# Altium PCB PCB3.PcbDoc
Units mm, origin at the board's own origin, x right, y up, seen from the top; angles counter-clockwise.
Board outline 136.14 x 105.28 mm, 2 copper layers (Top Layer, Bottom Layer), stack 1.571 mm thick; 97 components, 71 nets, 383 pads, 93 vias.
Unrouted connection lines stored in the file: 2.
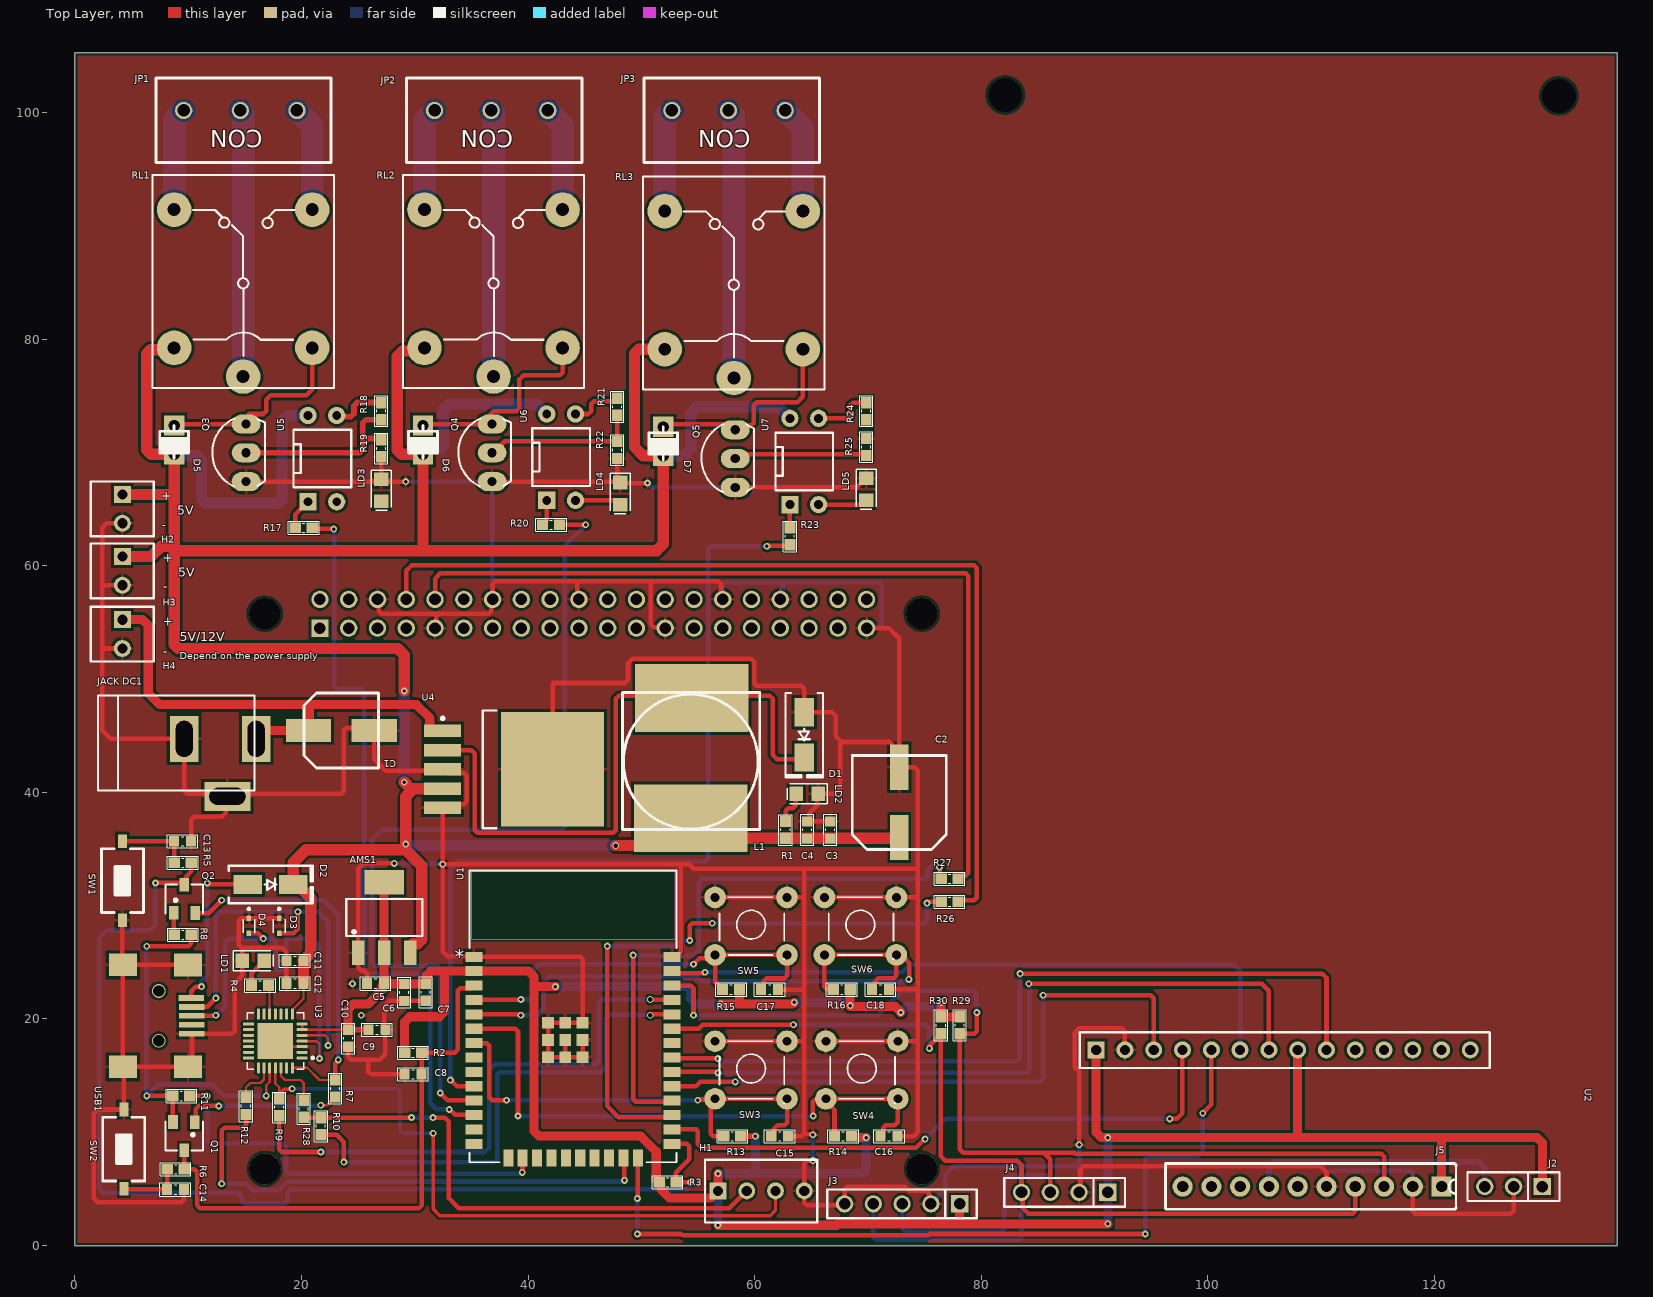
[diagram p0: Top Layer view]
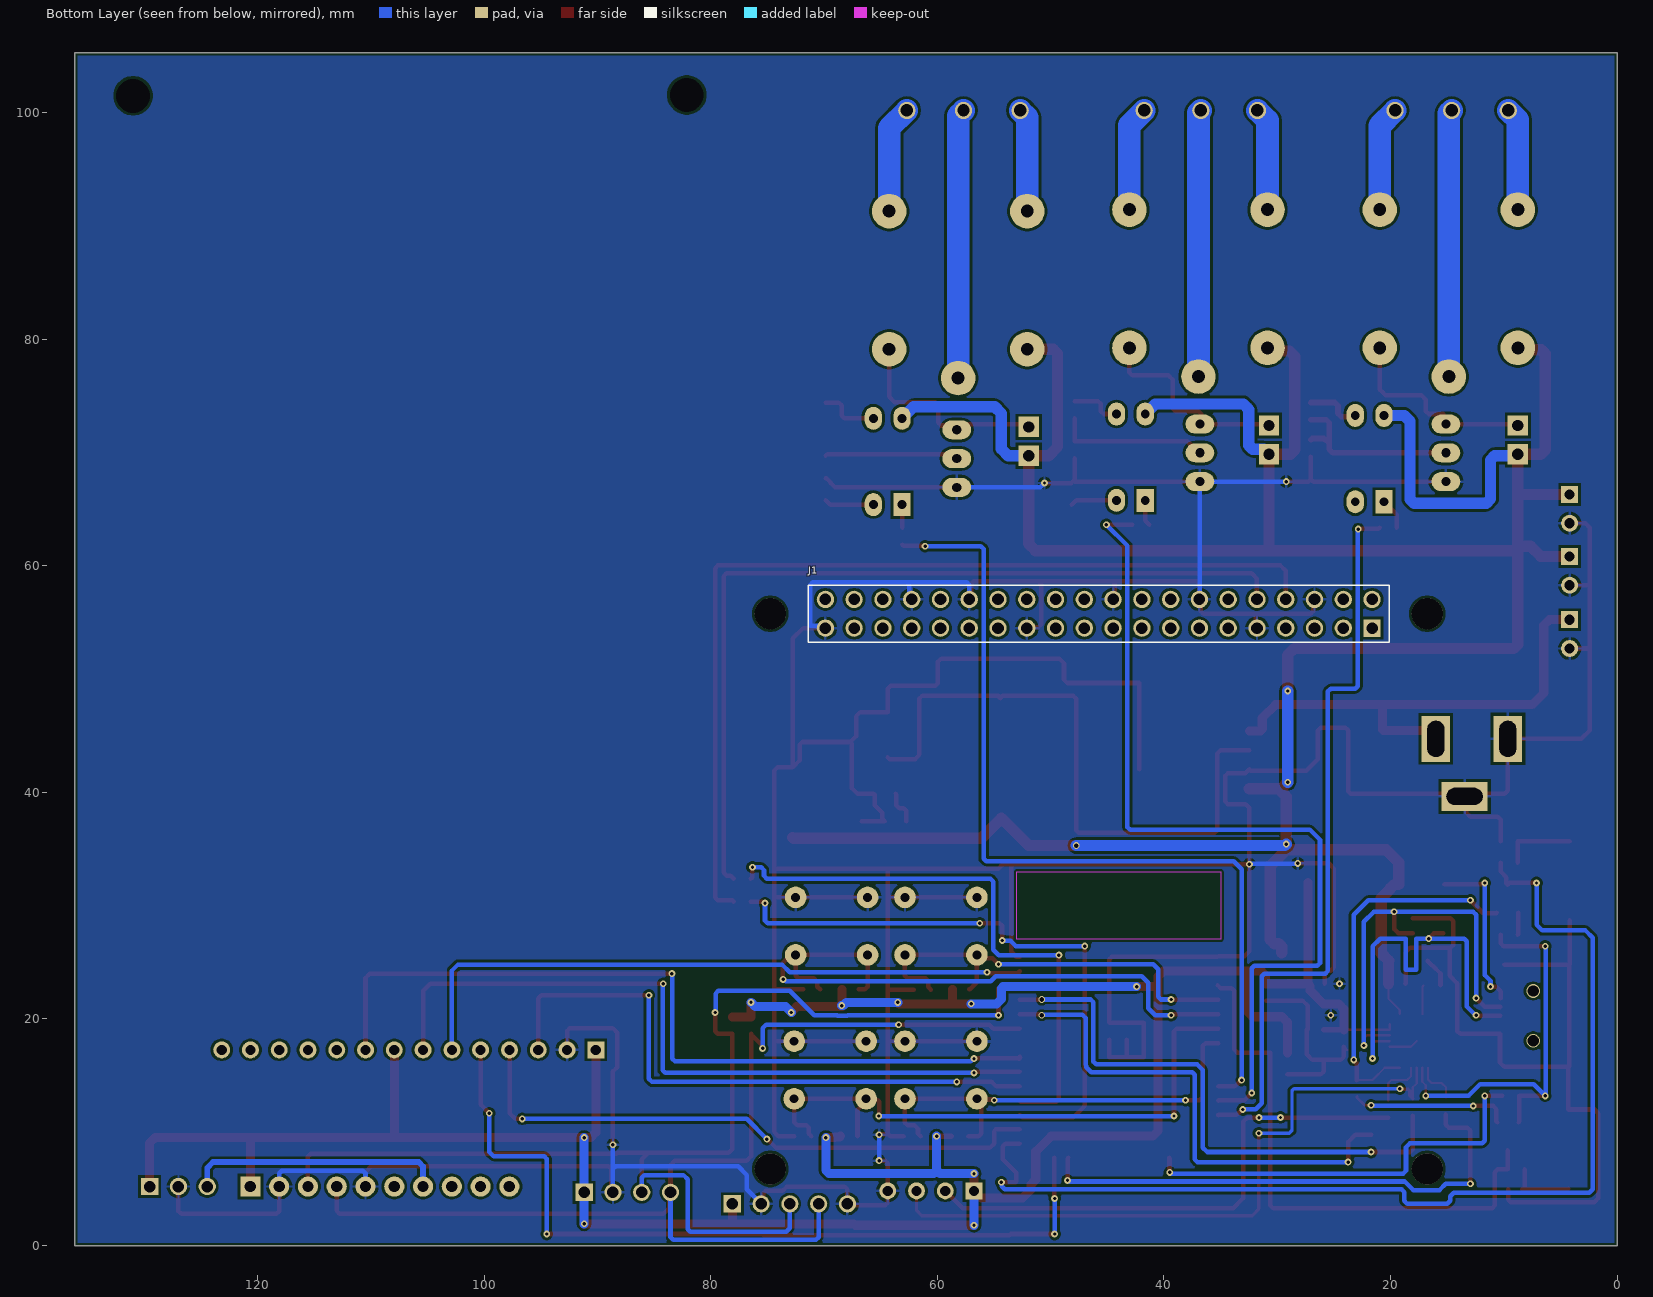
[diagram p1: Bottom Layer view, seen from below]
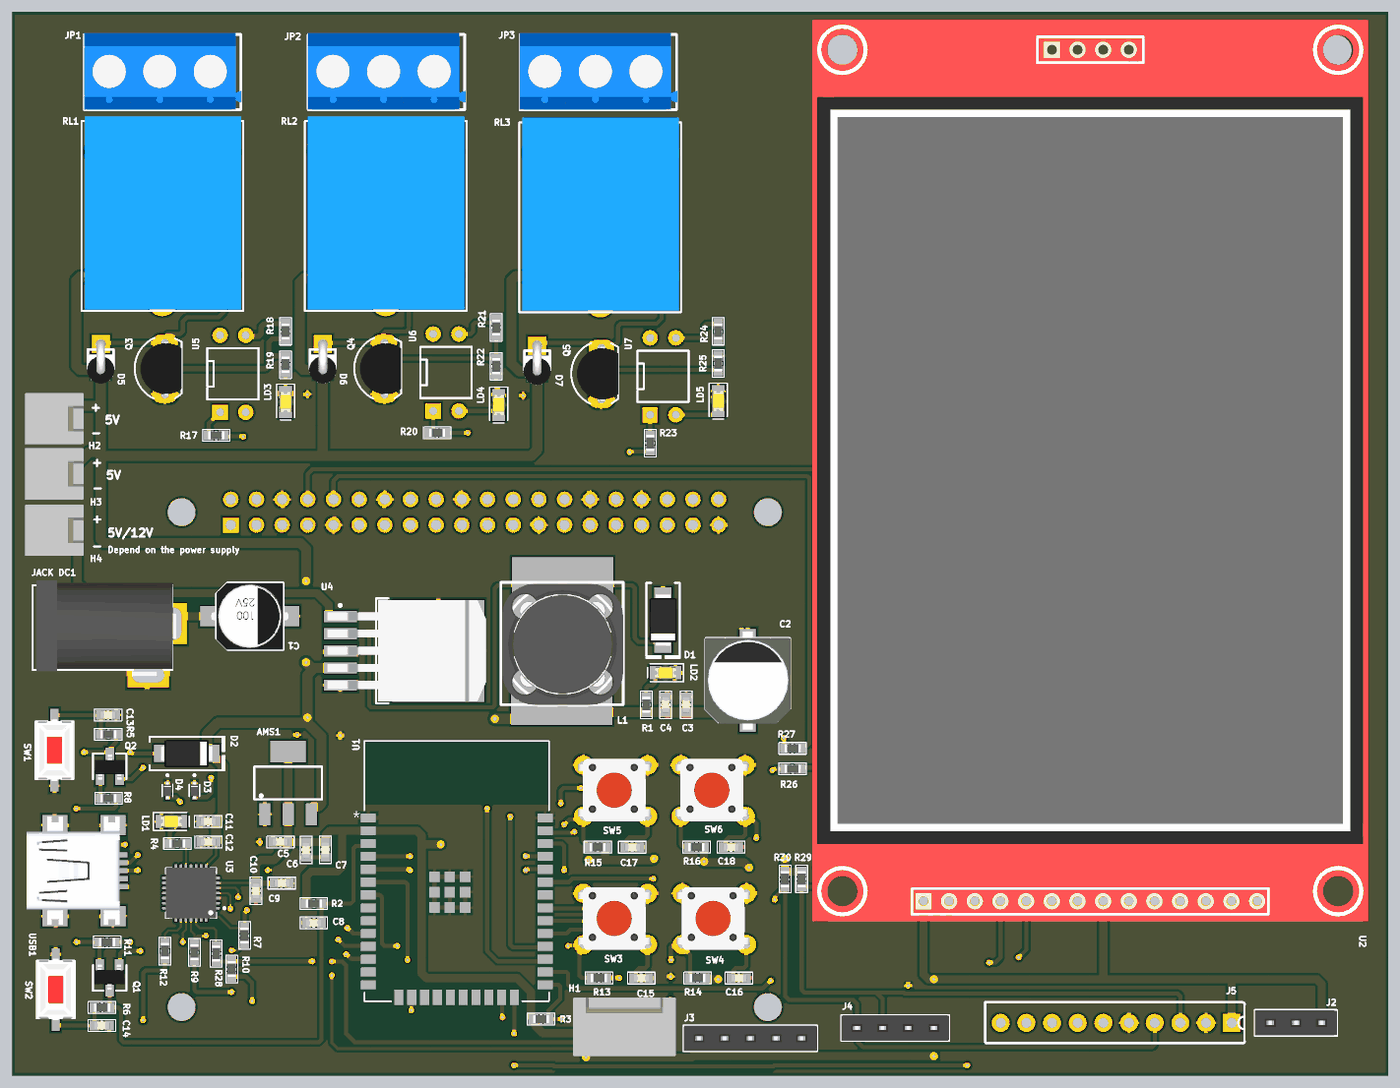
[diagram p2: 3D render of the assembled board from above, using the file's embedded part models]

## Layer stack, top to bottom
Top Solder: solder mask 0.0102, Solder Resist, Dk 3.5
Top Layer: signal copper 0.0356
Dielectric 1: dielectric 1.5, FR-4, Dk 4.8
Bottom Layer: signal copper 0.0356
Bottom Solder: solder mask 0.0102, Solder Resist, Dk 3.5

## Board outline
0,0 0,105.283 136.144,105.283 136.144,0

## Design rules (kind name [scope] priority, off if disabled: settings)
BoardOutlineClearance [All] p1: gap=0.25 ignorepadtopadclearanceinfootprint=FALSE
Clearance Clearance_1 [All] p1: gap=0.23 ignorepadtopadclearanceinfootprint=FALSE
Clearance Polygon [InPolygon] p2: gap=0.5 ignorepadtopadclearanceinfootprint=FALSE
PolygonConnect PolygonConnect_1 [All] p1: connectstyle=Relief reliefconductorwidth=0.254 reliefentries=4 polygonreliefangle="90 Angle" airgapwidth=0.254
PolygonConnect Via [All] p2: connectstyle=Direct reliefconductorwidth=0.254 reliefentries=4 polygonreliefangle="90 Angle" airgapwidth=0.254
RoutingVias [All] p1: holewidth=0.711 width=1.27 viastyle="Through Hole" minholewidth=0.3 minwidth=0.6 maxholewidth=0.711 maxwidth=1.27
SilkToSilkClearance [All] p1: silktosilkclearance=0.2
SolderMaskExpansion [All] p1: expansion=0.102 istentingtop=FALSE
SupplyNets "Schematic Supply Nets_4" [InNet('+5')] p1: voltage=0.000
SupplyNets "Schematic Supply Nets_3" [InNet('+12')] p2: voltage=0.000
SupplyNets "Schematic Supply Nets_1" [InNet('3.3V')] p3: voltage=0.000
SupplyNets "Schematic Supply Nets" [InNet('GND')] p4: voltage=0.000
Width 3.3V [InNet('3.3V')] p1: maxlimit=1.2 minlimit=0.2 preferedwidth=1 bottomlayer_minwidth=0.4 minimp=50.000000 maximp=50.000000 favimp=50.000000
Width 12V [InNet('+12')] p2: maxlimit=1.2 minlimit=0.8 preferedwidth=1 minimp=50.000000 maximp=50.000000 favimp=50.000000
Width 5V [InNet('+5')] p3: maxlimit=1.4 minlimit=0.2 preferedwidth=1.2 bottomlayer_minwidth=0.6 minimp=50.000000 maximp=50.000000 favimp=50.000000
Width JP [InNet('NetJP1_1') Or InNet('NetJP1_2') Or InNet('NetJP1_3')Or InNet('NetJP2_1') Or InNet('NetJP2_2') Or InNet('NetJP2_3') Or InNet('NetJP3_1') Or InNet('NetJP3_2') Or InNet('NetJP3_3')] p4: maxlimit=2 minlimit=1 preferedwidth=1.5 minimp=50.000000 maximp=50.000000 favimp=50.000000
Width [All] p5: maxlimit=0.5 minlimit=0.2 preferedwidth=0.4 minimp=50.000000 maximp=50.000000 favimp=50.000000
29 further rules are at their usual default settings.

## Components (designator, comment, footprint, x,y, rotation, side; value= is the part's Value field where it differs from the comment)
AMS1 "AMS1117-3.3V" SOT223 27.305,28.956 r0 top value="AMS1117-3.3V SOT223"
C1 "100uF" "tu nhom 6.3 (d)" 23.516,45.466 r0 top
C2 "220uF" "tu nhom 8 (e)" 72.771,39.116 r90 top
C3 "10uF" "Cap 0603" 66.675,36.703 r90 top
C4 "10uF" "Cap 0603" 64.643,36.703 r90 top
C5 "10uF" "Cap 0603" 26.543,23.114 r180 top
C6 "10uF" "Cap 0603" 29.091,22.332 r270 top
C7 "0.1uF" "Cap 0603" 30.988,22.352 r270 top
C8 "1nF" "Cap 0603" 29.849,15.105 r180 top
C9 "10uF" "Cap 0603" 26.67,19.05 r0 top
C10 "0.1uF" "Cap 0603" 24.13,18.288 r270 top
C11 "10uF" "Cap 0603" 19.411,25.138 r180 top
C12 "0.1uF" "Cap 0603" 19.431,23.114 r180 top
C13 "1nF" "Cap 0603" 9.505,35.679 r180 top
C14 "1nF" "Cap 0603" 8.87,4.945 r180 top
C15 "1nF" "Cap 0603" 62.23,9.652 r0 top
C16 "1nF" "Cap 0603" 71.882,9.652 r0 top
C17 "1nF" "Cap 0603" 61.341,22.606 r0 top
C18 "1nF" "Cap 0603" 71.116,22.614 r0 top
D1 "SS34" "DIODE SMA" 64.389,45.085 r270 top
D2 "SS14" "DIODE SMA" 17.272,31.877 r0 top
D3 "LESD5D5.0CT1G" TVS_LESD5D5.0CT1G 18.034,28.219 r270 top
D4 "LESD5D5.0CT1G" TVS_LESD5D5.0CT1G 15.367,28.219 r270 top
D5 "1N4007" "DIODE 1A" 8.763,72.39 r270 top
D6 "1N4007" "DIODE 1A" 30.734,72.39 r270 top
D7 "1N4007" "DIODE 1A" 51.943,72.263 r270 top
H1 "USB to UART" HDR4 56.769,4.826 r0 top
H2 "Header2" HDR2 4.191,66.294 r270 top
H3 "Header2" HDR2 4.191,60.833 r270 top
H4 "Header2" HDR2 4.191,55.245 r270 top
J1 "Raspberry Pi Header" SAMESKY_SSK04-FPH-254-B20 21.632,57.04 r0 bottom locked
J2 "Soil Moisture Sensor" JP3-C1T 129.54,5.207 r180 top
J3 "BH1750" JP5-C1T 78.105,3.683 r180 top
J4 "SHT31" JP4-C1T 91.186,4.699 r180 top
J5 "ADS1115" CON10 120.65,5.207 r270 top value="Connector 10"
"JACK DC1" "JACK DC 5.5" "JACK DC 5.5" 12.827,42.186 r0 top value="Jac DC"
JP1 "CON 3 DOMINO" "CON 3" 19.605,100.203 r180 top
JP2 "CON 3 DOMINO" "CON 3" 41.75,100.203 r180 top
JP3 "CON 3 DOMINO" "CON 3" 62.698,100.203 r180 top
L1 "100uH - 3A SMD" "Cuon Cam 12x12x10" 48.356,36.719 r0 top
LD1 "Led" "Led 0805" 15.748,25.146 r180 top
LD2 "Led" "Led 0805" 64.643,39.878 r0 top
LD3 "Led" "Led 0805" 27.051,66.675 r90 top
LD4 "Led" "Led 0805" 48.133,66.38 r90 top
LD5 "Led" "Led 0805" 69.85,66.761 r90 top
Q1 "Transistor NPN" SOT-23 9.652,9.652 r180 top
Q2 "Transistor NPN" SOT-23 9.652,30.607 r0 top
Q3 "C1815" TO92-123 15.113,69.977 r90 top
Q4 "C1815" TO92-123 36.83,69.977 r90 top
Q5 "C1815" TO92-123 58.293,69.469 r90 top
R1 "1k" "RES 0603" 62.738,36.703 r270 top
R2 "12k" "RES 0603" 29.857,17.018 r180 top
R3 "5k" "RES 0603" 52.324,5.588 r180 top
R4 "1k" "RES 0603" 16.34,22.957 r0 top
R5 "470" "RES 0603" 9.525,33.782 r180 top
R6 "470" "RES 0603" 8.902,6.731 r180 top
R7 "12k" "RES 0603" 22.987,13.855 r90 top
R8 "12k" "RES 0603" 9.525,27.432 r0 top
R9 "0" "RES 0603" 18.034,12.204 r270 top
R10 "0" "RES 0603" 21.717,10.541 r270 top
R11 "0" "RES 0603" 9.398,13.208 r0 top
R12 "0" "RES 0603" 15.113,12.319 r270 top
R13 "1k" "RES 0603" 58.039,9.652 r0 top
R14 "1k" "RES 0603" 67.806,9.652 r0 top
R15 "1k" "RES 0603" 57.924,22.606 r0 top
R16 "1k" "RES 0603" 67.691,22.606 r0 top
R17 "100" "RES 0603" 20.193,63.373 r0 top
R18 "1k" "RES 0603" 27.051,73.66 r90 top
R19 "10k" "RES 0603" 27.051,70.37 r270 top
R20 "100" "RES 0603" 42.037,63.627 r0 top
R21 "1k" "RES 0603" 47.879,74.041 r90 top
R22 "10k" "RES 0603" 47.879,70.231 r270 top
R23 "100" "RES 0603" 63.119,62.611 r270 top
R24 "1k" "RES 0603" 69.85,73.66 r90 top
R25 "10k" "RES 0603" 69.85,70.485 r90 top
R26 "1k" "RES 0603" 77.216,30.353 r180 top
R27 "1k" "RES 0603" 77.216,32.385 r180 top
R28 "470" "RES 0603" 20.193,12.065 r90 top
R29 "4.7k" "RES 0603" 78.105,19.443 r90 top
R30 "4.7k" "RES 0603" 76.454,19.431 r90 top
RL1 "Relay SPDT" RL_SPDT_10A 14.859,76.708 r90 top
RL2 "Relay SPDT" RL_SPDT_10A 36.957,76.708 r90 top
RL3 "Relay SPDT" RL_SPDT_10A 58.166,76.581 r90 top
SW1 "Nut Nhan 2 Chan SMD 3x6x2.5" "Nut Nhan 2 Chan SMD 3x6x2.5" 4.191,32.202 r90 top
SW2 "Nut Nhan 2 Chan SMD 3x6x2.5" "Nut Nhan 2 Chan SMD 3x6x2.5" 4.318,8.509 r270 top
SW3 "SW_CAPTURE" SW2-DIP 56.515,18.034 r0 top value="Button chip 4 pin"
SW4 "SW_UP" SW2-DIP 66.294,18.034 r0 top value="Button chip 4 pin"
SW5 "SW-OK" SW2-DIP 56.515,30.734 r0 top value="Button chip 4 pin"
SW6 "SW-DOWN" SW2-DIP 66.167,30.734 r0 top value="Button chip 4 pin"
U1 "ESP32-WROOM-32-N4" MOD_ESP32-WROOM-32_EXP 43.977,20.229 r0 top
U2 "TFT ILI9341" "TFT ILI9341" 90.155,17.272 r270 top
U3 "CP2102-GM" QFN50P500X500X100-29N 17.696,18.058 r180 top
U4 "LM2596S-5.0" TO-263-5 38.764,42.037 r0 top
U5 "PC817B" "DIP 4" 20.574,65.659 r0 top
U6 "PC817B" "DIP 4" 41.656,65.786 r0 top
U7 "PC817B" "DIP 4" 63.119,65.405 r0 top
USB1 "USB Mini 5p SMD" "USB Mini 5p SMD" 6.858,20.193 r90 top

## Footprints (in the part's own frame and the unit in brackets; to place one, negate y for a bottom-side part, rotate by r counter-clockwise, add the part's x,y. Pads: shape width x height; smd on the part's side, far side on the other; paste and mask are expansions set on the pad)
"Cap 0603" [mm]
  rect 0.889x0.95 smd mask+0.076: 1(-0.758,-0.008) 2(0.742,-0.008)
  silkscreen extent -1.35,-0.59 1.36,0.58, body extent -0.77,-0.41 0.83,0.39, height 0.78
CON10 [mil]
  rect 70x70 hole 39.37: 1(0,0)
  round 70 hole 39.37: 2(0,-100) 3(0,-200) 4(0,-300) 5(0,-400) 7(0,-600)
  round 70 hole 39.37 unplated: 6(0,-500) 8(0,-700) 9(0,-800) 10(0,-900)
  silkscreen extent -80,-960 79,50
"CON 3" [mil]
  round 60 hole 43.31: 1(0,0) 2(196.85,0) 3(393.7,0)
  silkscreen extent -119,-113 491,181, body extent -122,-118 492,181, height 394
"Cuon Cam 12x12x10" [mm] "Cuon Cam 12x12x10"
  rect 10x6 smd: 1(6.1,11.6) 2(6,1)
  silkscreen extent 0,0 12.1,12.1, body extent 0.1,-0.2 12.1,12.14, height 7.51
"DIODE 1A" [mm]
  rect 1.8x1.8 hole 1: 1(0,0) 2(2.54,0)
  silkscreen extent 0,-1.27 2.92,1.27, body extent -0.43,-1.37 3.91,1.36, height 10.64
"DIODE SMA" [mm] "SMA"
  rect 2.5x1.7 smd: 1(-2,0) 2(2,0)
  silkscreen extent -3.68,-1.65 3.75,1.65, body extent -2.6,-1.37 2.6,1.37, height 2.4
"DIP 4" [mil] "DIP IC (2.54mm), 4 pins"
  rect 60x60 / inner round 60 / far side rect 60x80 hole 31: 1(0,0)
  round 60 / inner round 60 / far side oval 60x80 hole 31: 2(100,0) 3(100,300) 4(0,300)
  silkscreen extent -50,50 150,250
HDR2 [mm] "Connector; Header; 2 Position"
  rect 1.5x1.5 hole 0.9: 1(0,0)
  round 1.5 hole 0.9: 2(2.54,0)
  silkscreen extent -1.14,-2.79 3.68,2.77, body extent -1.27,-2.92 3.81,2.88, height 11.72
HDR4 [mm] "Connector; Header; 4 Position"
  rect 1.5x1.5 hole 0.9: 1(0,0)
  round 1.5 hole 0.9: 2(2.54,0) 3(5.08,0) 4(7.62,0)
  silkscreen extent -1.14,-2.79 8.76,2.74, body extent -1.27,-2.92 8.89,2.88, height 11.72
"JACK DC 5.5" [mm] "Jac DC input"
  rect 2.54x4.064 hole 1.5 slot 3.2 at 90 deg: 1(3.175,2.54) 2(-3.175,2.54)
  rect 4.064x2.54 hole 1.5 slot 3.2 at 0 deg: 3(0.635,-2.54)
  silkscreen extent -10.79,-2.03 3.05,6.35, body extent -10.42,-2.67 3.4,6.84, height 11.02
JP3-C1T [mm] "3 row, straight, gold plating"
  rect 1.52x1.52 hole 1.02: 1(0,0)
  round 1.52 hole 1.02: 2(2.54,0) 3(5.08,0)
  silkscreen extent -1.52,-1.27 6.6,1.27, body extent -1.52,-1.25 6.6,1.25, height 8.51
JP4-C1T [mm] "4 row, straight, gold plating"
  rect 1.52x1.52 hole 1.02: 1(0,0)
  round 1.52 hole 1.02: 2(2.54,0) 3(5.08,0) 4(7.62,0)
  silkscreen extent -1.52,-1.27 9.14,1.27, body extent -1.52,-1.25 9.14,1.25, height 8.51
JP5-C1T [mm] "5 row, straight, gold plating"
  rect 1.52x1.52 hole 1.02: 1(0,0)
  round 1.52 hole 1.02: 2(2.54,0) 3(5.08,0) 4(7.62,0) 5(10.16,0)
  silkscreen extent -1.52,-1.27 11.68,1.27, body extent -1.52,-1.25 11.68,1.25, height 8.51
"Led 0805" [mm] "Led SMD 0805"
  rect 1.2x1.3 smd: 1(-0.975,0) 2(0.975,0)
  silkscreen extent -1.78,-0.89 1.78,0.89, body extent -1.01,-0.64 1.01,0.61, height 1.1
MOD_ESP32-WROOM-32_EXP [mil]
  rect 59x35 smd paste+0 mask+0: 1(-344.49,207.09) 2(-344.49,157.09) 3(-344.49,107.09) 4(-344.49,57.09) 5(-344.49,7.09) 6(-344.49,-42.91) 7(-344.49,-92.91) 8(-344.49,-142.91) 9(-344.49,-192.91) 10(-344.49,-242.91) 11(-344.49,-292.91) 12(-344.49,-342.91) 13(-344.49,-392.91) 14(-344.49,-442.91) 25(344.49,-442.91) 26(344.49,-392.91) 27(344.49,-342.91) 28(344.49,-292.91) 29(344.49,-242.91) 30(344.49,-192.91) 31(344.49,-142.91) 32(344.49,-92.91) 33(344.49,-42.91) 34(344.49,7.09) 35(344.49,57.09) 36(344.49,107.09) 37(344.49,157.09) 38(344.49,207.09)
  rect 35x59 smd paste+0 mask+0: 15(-225,-492.13) 16(-175,-492.13) 17(-125,-492.13) 18(-75,-492.13) 19(-25,-492.13) 20(25,-492.13) 21(75,-492.13) 22(125,-492.13) 23(175,-492.13) 24(225,-492.13)
  rect 41x41 smd paste+0 mask+0: 39(-26.77,-81.89) 40(-86.81,-21.85) 41(-86.81,-81.89) 42(-86.81,-141.93) 43(-26.77,-141.93) 44(33.27,-141.93) 45(33.27,-81.89) 46(33.27,-21.85) 47(-26.77,-21.85)
  Keep-Out Layer region: 354.5,502 -354.5,502 -354.5,268 354.5,268
  silkscreen extent -360,-507 360,507
"Nut Nhan 2 Chan SMD 3x6x2.5" [mm] "Switch SMD type"
  rect 1.2x0.8 smd: 1(-3.5,0) 2(3.5,0)
  silkscreen extent -2.82,-1.85 2.82,1.85, body extent -3.05,-1.85 3.05,1.85, height 2.5
QFN50P500X500X100-29N [mm]
  rrect50% 0.97x0.26 smd: 1(-2.37,1.5) 2(-2.37,1) 3(-2.37,0.5) 4(-2.37,0) 5(-2.37,-0.5) 6(-2.37,-1) 7(-2.37,-1.5) 15(2.37,-1.5) 16(2.37,-1) 17(2.37,-0.5) 18(2.37,0) 19(2.37,0.5) 20(2.37,1) 21(2.37,1.5)
  rrect50% 0.26x0.97 smd: 8(-1.5,-2.37) 9(-1,-2.37) 10(-0.5,-2.37) 11(0,-2.37) 12(0.5,-2.37) 13(1,-2.37) 14(1.5,-2.37) 22(1.5,2.37) 23(1,2.37) 24(0.5,2.37) 25(0,2.37) 26(-0.5,2.37) 27(-1,2.37) 28(-1.5,2.37)
  rect 3.15x3.15 smd paste-0.585: 29(0,0)
  silkscreen extent -3.4,-2.5 2.5,2.5, body extent -2.5,-2.5 2.5,2.5, height 1
"RES 0603" [mm] "RES 0603"
  rect 1x0.95 smd mask+0.076: 1(-0.75,0) 2(0.75,0)
  silkscreen extent -1.35,-0.58 1.37,0.58, body extent -0.8,-0.4 0.8,0.4, height 0.45
RL_SPDT_10A [mil] "Relay SPDT, 5 pin, 10A,W 650mil, L 800mil, H 800mil"
  round 120 hole 45: 1(0,0) 2(580,240) 3(580,-240) 4(100,-240) 5(100,240)
  silkscreen extent -40,-315 700,315, body extent -33,-307 719,303, height 642
SAMESKY_SSK04-FPH-254-B20 [mm]
  rect 1.53x1.53 / inner round 1.53 / far side rect 1.53x1.53 hole 1.02 mask+0.102: 1(0,2.54)
  round 1.53 hole 1.02 mask+0.102: 2(0,0) 3(2.54,2.54) 4(2.54,0) 5(5.08,2.54) 6(5.08,0) 7(7.62,2.54) 8(7.62,0) 9(10.16,2.54) 10(10.16,0) 11(12.7,2.54) 12(12.7,0) 13(15.24,2.54) 14(15.24,0) 15(17.78,2.54) 16(17.78,0) 17(20.32,2.54) 18(20.32,0) 19(22.86,2.54) 20(22.86,0) 21(25.4,2.54) 22(25.4,0) 23(27.94,2.54) 24(27.94,0) 25(30.48,2.54) 26(30.48,0) 27(33.02,2.54) 28(33.02,0) 29(35.56,2.54) 30(35.56,0) 31(38.1,2.54) 32(38.1,0) 33(40.64,2.54) 34(40.64,0) 35(43.18,2.54) 36(43.18,0) 37(45.72,2.54) 38(45.72,0) 39(48.26,2.54) 40(48.26,0)
  silkscreen extent -1.52,-1.23 49.78,3.77
SOT223 [mm] "SOT-223/SC-73; 4 Leads; Body 6.7 x 7.3 mm, inc. leads (LxW max)"
  rect 1.1x2.15 smd: 1(-2.3,-3.1) 2(0,-3.1) 3(2.3,-3.1)
  rect 3.5x2.15 smd: 4(0,3.1)
  silkscreen extent -3.35,-1.63 3.35,1.63, body extent -3.43,-1.65 3.43,1.65, height 2.54
SOT-23 [mm] "SOT 23 _ 1-3-2"
  rect 0.85x1.2 smd: 1(-0.94,-1.245) 2(0.985,-1.25) 3(0.005,1.25)
  silkscreen extent -1.65,-1.27 1.65,1.27, body extent -1.47,-1.33 1.53,1.17, height 1.06
SW2-DIP [mil] "SW button 4pin, 250 x250 mil"
  round 75 hole 31: 1(0,0) 2(0,-200) 3(250,-200) 4(250,0)
  silkscreen extent 15,-215 240,0, body extent -36,-220 276,24, height 276
"TFT ILI9341" [mm]
  rect 1.5x1.5 hole 0.9: 1(0,0)
  round 1.5 hole 0.9: 2(0,2.54) 3(0,5.08) 4(0,7.62) 5(0,10.175) 6(0,12.7) 7(0,15.25) 8(0,17.79) 9(0,20.33) 10(0,22.87) 11(0,25.41) 12(0,27.95) 13(0,30.49) 14(0,33.03)
  round 1.524 hole 3: 28(-84.3,-8.025) 29(-84.225,40.85)
  silkscreen extent -1.55,-1.45 1.6,34.75, body extent -87.27,-11.02 2.02,44.02, height 6
TO92-123 [mil] "TO-92"
  oval 66x100 hole 32: 1(-100,0) 2(0,0) 3(100,0)
  silkscreen extent -117,-65 120,118, body extent -109,-66 109,95, height 245
TO-263-5 [mm] "D2-PAK, 6-Pads, Body 8.9x10.4mm (max), IPC Medium Density"
  rect 3.25x1.1 smd: 1(-6.3,3.4) 2(-6.3,1.7) 3(-6.3,0) 4(-6.3,-1.7) 5(-6.3,-3.4)
  rect 9.1x10.1 smd: 6(3.4,0)
  silkscreen extent -6.42,-5.2 -1.55,5.2, body extent -7.56,-4.98 8.11,5.02, height 4.83
"tu nhom 6.3 (d)" [mm]
  rect 4x2 smd: 1(-2.9,0) 2(2.9,0)
  silkscreen extent -3.3,-3.3 3.3,3.3, body extent -3.8,-3.3 3.8,3.3, height 8
"tu nhom 8 (e)" [mm]
  rect 4x1.6 smd: 1(-3.1,0) 2(3.1,0)
  silkscreen extent -4.15,-4.15 4.15,4.15, body extent -4.88,-4.25 4.82,4.25, height 10.5
TVS_LESD5D5.0CT1G [mm]
  rect 0.48x0.4 smd: 1(-0.66,0) 2(0.66,0)
  silkscreen extent -1.6,-0.52 0.6,0.52, body extent -0.8,-0.4 0.8,0.4, height 0.7
"USB Mini 5p SMD" [mm]
  rect 0.5x2.25 smd: 1(1.651,-3.429) 2(0.864,-3.442) 3(0.076,-3.454) 4(-0.711,-3.467) 5(-1.499,-3.48)
  rect 2x2.5 smd: 5(-4.424,-3.124) 5(-4.42,2.616) 5(4.576,-3.124) 5(4.58,2.616)
  body extent -5.27,-3.8 5.43,5.4, height 3.95

## Part data
AMS1: library part "AMS1117 SMD", "Dán", Chung_Loai=Dán, Don_Vi=Con, Ma_Hang=MH000596
C1: library part "Tu Nhom 100uF 16V", "Dán", Chung_Loai=Dán, Don_Vi=Con, Ma_Hang=MH002219, So_Chan=2, Ten_Linh_Kien="Tụ Nhôm 100uF 16V 6.3x5.4MM"
C2: library part "Tu Nhom 220uF 10V", "Dán", Chung_Loai=Dán, Don_Vi=Con, Ma_Hang=MH004021, So_Chan=2, Ten_Linh_Kien="Tụ Nhôm 220uF 10V"
C3 C4 C5 C6 C7 C8 C9 C10 C11 C12 C13 C14 C15 C16 C17 C18: library part "Cap 0603", "Capacitor SMD 0603"
D1: library part "Diode SS34 ( 1N5822 )", "Dán", Chung_Loai=Dán, Don_Vi=Con, Ma_Hang=MH002104, Ten_Linh_Kien="Diode SS34 3A 40V SMA ( 1N5822 SS34A)"
D2: library part "Diode SS14 ( 1N5819)", "Dán", Chung_Loai=Dán, Don_Vi=Con, Ma_Hang=MH002211, Ten_Linh_Kien="Diode SS14 DO214 Schottky 1A 40V ( 1N5819 DO214)"
D3 D4: "Transient Voltage Suppressors for ESD Protection", Package=None, Availability="Not in stock", Check_prices=https://www.snapeda.com/parts/LESD5D5.0CT1G/Leshan+Radio+Co./view-part/?ref=eda, MF="Leshan Radio Co.", MP=LESD5D5.0CT1G, Price=None, SnapEDA_Link=https://www.snapeda.com/parts/LESD5D5.0CT1G/Leshan+Radio+Co./view-part/?ref=snap
D5 D6 D7: library part "Diode 1N4007", "Cắm", Chung_Loai=Cắm, Don_Vi=Con, Ma_Hang=MH001063, Ten_Linh_Kien="Diode 1N4007 1A (DIP)"
H1: library part Header4, "Header IDC, 4 x 1 Pin Vertical 2.54mm Pitch (Non-Boxed, Male)", Manufacturer="W¨¹rth Elektronik eiSos GmbH", partNo=613002143121, ComponentLink1 Description=Manufacturer, ComponentLink1URL=http://www.we-online.com, ComponentLink2 Description=Datasheet, ComponentLink2URL=http://katalog.we-online.de/em/datasheet/6130xx143121.pdf, Created by="Karrer Zheng", Created Date="29 March 2013", NoPins=02
H2 H3 H4: "Header IDC, 2 x 1 Pin Vertical 2.54mm Pitch (Non-Boxed, Male)", Manufacturer="W¨¹rth Elektronik eiSos GmbH", partNo=613002143121, ComponentLink1 Description=Manufacturer, ComponentLink1URL=http://www.we-online.com, ComponentLink2 Description=Datasheet, ComponentLink2URL=http://katalog.we-online.de/em/datasheet/6130xx143121.pdf, Created by="Karrer Zheng", Created Date="29 March 2013", NoPins=02
J1: library part SSK04-FPH-254-B20, "40 Position Header Connector 0.100 (2.54mm) Through Hole Gold", Package=None, Check_prices=https://www.snapeda.com/parts/SSK04-FPH-254-B20/Same+Sky/view-part/?ref=eda, MF="Same Sky (Formerly CUI Devices)", MP=SSK04-FPH-254-B20, SnapEDA_Link=https://www.snapeda.com/parts/SSK04-FPH-254-B20/Same+Sky/view-part/?ref=snap
J2: library part JP3, "WR-PHD 2.54 mm Angled Socket Header", Manufacturer="W¨¹rth Elektronik eiSos GmbH", partNo=613003143121, ComponentLink1 Description=Manufacturer, ComponentLink1URL=http://www.we-online.com, ComponentLink2 Description=Datasheet, ComponentLink2URL=http://katalog.we-online.de/em/datasheet/6130xx143121.pdf, Created by="Karrer Zheng", Created Date="29 March 2013", NoPins=03
J3: library part JP5, "WR-PHD 2.54 mm Angled Socket Header", Manufacturer="W¨¹rth Elektronik eiSos GmbH", partNo=613005143121, ComponentLink1 Description=Manufacturer, ComponentLink1URL=http://www.we-online.com, ComponentLink2 Description=Datasheet, ComponentLink2URL=http://katalog.we-online.de/em/datasheet/6130xx143121.pdf, Created by="Karrer Zheng", Created Date="29 March 2013", NoPins=05
J4: library part JP4, "WR-PHD 2.54 mm Angled Socket Header", Manufacturer="W¨¹rth Elektronik eiSos GmbH", partNo=613004143121, ComponentLink1 Description=Manufacturer, ComponentLink1URL=http://www.we-online.com, ComponentLink2 Description=Datasheet, ComponentLink2URL=http://katalog.we-online.de/em/datasheet/6130xx143121.pdf, Created by="Karrer Zheng", Created Date="29 March 2013", NoPins=04
J5: library part Con10, "Connector 10"
L1: library part "CUON CAM 100uH SMD", "Dán", Chung_Loai=Dán, Don_Vi=Con, Ten_Linh_Kien="Cuộn Cảm 100uH 7x7x4MM CD74"
LD1 LD2 LD3 LD4 LD5: "Typical LED"
Q1 Q2: "NPN Bipolar Transistor"
Q3 Q4 Q5: library part 2N222, "NPN 600mW, ECB"
R1 R2 R3 R4 R5 R6 R7 R8 R9 R10 R11 R12 R13 R14 R15 R16 R17 R18 R20 R21 R23 R24 R26 R27 R28 R29 R30: library part "RES 0603", "RES SMD 0603", Manufacturer="Vishay Dale", Manufacturer Part Number=CRCW040210K0FKED, Operating Temperature="-55°C ~ 155°C", Package / Case="0402 (1005 Metric)", Power (Watts)="0.063W, 1/16W", Resistance (Ohms)=10k, Supplier Part Number 1=541-10.0KLCT-ND, Temperature Coefficient=±100ppm/°C, Tolerance=±1%, Category=Resistors, ComponentLink1Description=http://www.vishay.com/docs/20035/dcrcwe3.pdf, ComponentLink1URL=http://www.vishay.com/docs/20035/dcrcwe3.pdf, Composition="Thick Film", Features="Automotive AEC-Q200", Height="0.016\" (0.40mm)", Number of Terminations=2, Packaging="Cut Tape (CT)", Pricing 1="10=0.083, 50=0.0444, 200=0.0255, 1000=0.0174 (USD)", RoHS="RoHS Compliant", Size / Dimension="0.039\" L x 0.020\" W (1.00mm x 0.50mm)", Stock 1=2392462, Supplier 1=Digi-Key, Supplier Device Package="0402 (1005 Metric)"
R19 R22 R25: library part "RES 0603", "RES SMD 0603", Manufacturer="Vishay Dale", Manufacturer Part Number=CRCW040210K0FKED, Operating Temperature="-55°C ~ 155°C", Package / Case="0402 (1005 Metric)", Power (Watts)="0.063W, 1/16W", Supplier Part Number 1=541-10.0KLCT-ND, Temperature Coefficient=±100ppm/°C, Tolerance=±1%, Category=Resistors, ComponentLink1Description=http://www.vishay.com/docs/20035/dcrcwe3.pdf, ComponentLink1URL=http://www.vishay.com/docs/20035/dcrcwe3.pdf, Composition="Thick Film", Features="Automotive AEC-Q200", Height="0.016\" (0.40mm)", Number of Terminations=2, Packaging="Cut Tape (CT)", Pricing 1="10=0.083, 50=0.0444, 200=0.0255, 1000=0.0174 (USD)", Resistance (Ohms)=10k, RoHS="RoHS Compliant", Size / Dimension="0.039\" L x 0.020\" W (1.00mm x 0.50mm)", Stock 1=2392462, Supplier 1=Digi-Key, Supplier Device Package="0402 (1005 Metric)"
SW3 SW4 SW5 SW6: library part SW4, "Switch button 4 pin"
U1: "Description", Manufacturer_Name="Espressif Systems", Copyright="Copyright (C) 2025 Ultra Librarian. All rights reserved.", Manufacturer_Part_Number=ESP32-WROOM-32-N4, RefDes=RefDes, Type=RF
U3: "USB Bridge, USB to UART USB 2.0 UART Interface 28-QFN (5x5)", Package="QFN-28 Silicon Labs", Check_prices=https://www.snapeda.com/parts/CP2102-GM/Silicon+Labs/view-part/?ref=eda, MF="Silicon Labs", MP=CP2102-GM, SnapEDA_Link=https://www.snapeda.com/parts/CP2102-GM/Silicon+Labs/view-part/?ref=snap
U4: "Simple Switcher 3A Step-Down Voltage Regulator"
U5 U6 U7: library part "Opto PC817B"
USB1: "USB Type B", Ma_Hang=MH001022, Ten="MiniUSB 5P SMD"
SW1 SW2: Ma_Hang=MH001036, Ten="Nút Nhấn 2 Chân 3x6x2.5MM SMD"

## Free pads (board coordinates)
  round 2.75 hole 2.75: 1(16.762,6.77) 2(16.762,55.77) 3(74.762,55.77) 4(74.762,6.77)

## Via types
v1: diameter 0.6, hole 0.3, Top Layer to Bottom Layer, 88 vias
v2: diameter 0.6, hole 0.4, Top Layer to Bottom Layer, 3 vias
v3: diameter 1.2, hole 1, Top Layer to Bottom Layer, 2 vias

## Nets (pads, with @x,y where several pads share a name; then routed paths per layer and width w, separated by ;. In a path a pad name is that pad's centre, name@x,y a point inside that pad or via, vN(x,y) a via of type N, cw(c..) or ccw(c..) an arc to the next point about the centre after c; other vN are vias at no path point)
3.3V: AMS1.2 AMS1.4 C5.1 C6.1 C7.1 C9.1 C10.1 H1.1 J2.1 J3.1 J4.1 J5.1 R2.2 R3.2 R13.2 R14.2 R15.2 R16.2 R29.2 R30.2 U1.2 U2.1 U2.8 U3.6 U3.7 | length 257.2
  Top Layer w0.2: U3.7 U3.6 24.109,19.058 C10.1
  Top Layer w0.4: C5.1 C5.1@27.317,23.106 ; AMS1.2@27.303,25.854 AMS1.2 ; C6.1@29.067,23.106 C6.1 C6.1@29.093,23.1 ; C7.1@30.97,23.1 C7.1
  Top Layer w0.5: C10.1 C9.1@25.909,19.046 ; v1@42.399,22.879 v1(42.418,22.86) ; 51.32,6.106 51.324,6.102 ; R3.2@51.549,5.588 R3.2 ; R13.2 v1(60.071,9.652) ; R30.2 R30.2@76.46,20.187 ; R29.2@78.099,20.187 R29.2
  Top Layer w0.8: C10.1 24.122,20.867 24.59,21.336 25.929,21.336 27.106,22.514 27.106,22.928 C5.1 27.303,23.124 AMS1.2@27.303,25.854 ; AMS1.2 AMS1.4 ; C5.1@27.317,23.106 C6.1@29.067,23.106 ; C6.1@29.093,23.1 C7.1@30.97,23.1 ; R2.2 29.107,19.724 29.576,20.193 32.17,20.193 32.639,20.662 32.639,24.092 32.766,24.219 ; C7.1 31.01,23.11 31.055,23.154 31.055,23.865 31.408,24.219 32.766,24.219 ; U1.2 32.766,24.219 ; U1.2@35.238,24.23 40.044,24.23 40.513,23.761 40.513,22.879 ; v1@42.399,22.879 40.513,22.879 ; 51.32,6.106 51.32,8.284 49.952,9.652 40.982,9.652 40.513,10.121 40.513,22.879 ; 51.324,6.102 51.324,5.813 R3.2@51.549,5.588 ; R3.2@51.76,5.402 51.76,4.937 52.506,4.191 56.134,4.191 H1.1 v1(56.769,6.35) ; v1(56.769,1.791) 67.222,1.791 67.347,1.916 77.862,1.916 ; v1(57.023,21.336) 58.547,21.336 ; R15.2 58.674,21.463 58.547,21.336 ; v1(63.5,21.463) 63.373,21.336 58.547,21.336 ; v1@68.441,21.094 v1@68.441,21.182 ; R16.2 v1@68.441,21.182 ; v1@68.453,21.082 72.429,21.082 72.898,20.613 v1(72.898,20.574) ; v1(68.453,21.182) v1@68.441,21.182 ; R14.2 68.631,9.577 69.04,9.577 69.092,9.525 v1(69.85,9.525) ; R30.2 v1(76.454,21.463) ; R30.2@76.46,20.187 R29.2@78.099,20.187 ; J3.1 78.105,2.159 77.862,1.916 ; U2.1 90.155,9.994 90.624,9.525 v1(91.186,9.525) 107.945,9.525 ; v1(91.186,1.916) 77.862,1.916 ; U2.8 107.945,9.525 ; J5.1 120.65,9.525 ; J2.1 129.54,9.056 129.071,9.525 120.65,9.525 ; 107.945,9.525 120.65,9.525
  Bottom Layer w0.5: 54.196,22.86 54.356,22.7
  Bottom Layer w0.8: v1(42.418,22.86) 54.196,22.86 ; 54.356,22.7 54.356,21.756 54.776,21.336 v1(57.023,21.336) ; v1(56.769,1.791) H1.1 ; v1(56.769,6.35) 59.778,6.35 60.071,6.643 ; v1(60.071,9.652) 60.071,6.643 ; v1(63.5,21.463) 68.045,21.463 68.326,21.182 v1(68.453,21.182) ; v1(69.85,9.525) 69.85,6.643 69.557,6.35 60.364,6.35 60.071,6.643 ; v1(72.898,20.574) 73.406,21.082 76.073,21.082 v1(76.454,21.463) ; v1(91.186,1.916) J4.1 v1(91.186,9.525)
+5: AMS1.3 C2.1 C3.1 C4.1 C11.1 C12.1 D2.2 D5.2 D6.2 D7.2 H2.1 H3.1 L1.2 R1.2 RL1.5 RL2.5 RL3.5 U3.8 U4.4 U5.4 U6.4 U7.4 | length 301.3
  Top Layer w0.2: U3.8 19.196,20.783 20.189,21.776 C12.1
  Top Layer w1: H3.1 6.731,60.833 7.62,61.722 8.763,61.722 ; H2.1 8.763,66.294 ; 6.35,70.231 6.731,69.85 D5.2 8.763,66.294 ; 6.35,70.485 6.35,78.73 6.701,79.081 8.596,79.081 RL1.5 ; D2.2 19.272,33.814 20.383,34.925 29.21,34.925 ; D2.2@19.619,31.877 19.672,31.877 20.022,31.527 20.022,31.474 20.828,30.668 20.828,25.805 C11.1 ; C12.1 C11.1@20.189,25.126 ; 28.448,70.231 28.829,69.85 D6.2 30.734,61.341 ; 28.448,70.485 28.448,78.486 28.921,78.959 30.572,78.959 RL2.5 ; v1(29.083,40.894) 29.64,40.337 29.923,40.337 ; v1(29.083,48.952) 29.083,52.119 28.497,52.705 9.114,52.705 8.763,53.056 8.763,61.341 ; AMS1.3 29.605,26.381 29.855,26.631 30.256,26.631 30.607,26.982 30.607,33.528 29.21,34.925 ; U4.4 29.923,40.337 ; v2(47.752,35.306) 51.943,35.306 L1.2 56.122,35.953 R1.2 64.644,35.953 C4.1 C3.1 72.7,35.945 C2.1 ; 49.403,70.485 50.165,69.723 D7.2 51.943,61.927 51.357,61.341 30.734,61.341 ; 49.403,70.739 49.403,78.74 49.784,79.121 RL3.5 ; 8.763,61.341 8.763,61.722 ; 8.763,61.341 30.734,61.341 ; 8.763,61.722 8.763,66.294 ; 29.21,34.925 v1(29.21,35.433) 29.21,39.624 29.923,40.337
  Bottom Layer w1: D5.2 8.89,69.723 10.795,69.723 11.176,69.342 11.176,65.913 11.557,65.532 17.937,65.532 18.288,65.883 18.288,72.771 18.796,73.279 U5.4 ; v1(29.083,40.894) v1(29.083,48.952) ; v1(29.21,35.433) 29.337,35.306 v2(47.752,35.306) ; D6.2 31.18,70.296 32.161,70.296 32.512,70.648 32.512,73.787 32.639,73.914 32.639,73.944 32.99,74.295 40.771,74.295 41.656,73.41 U6.4 ; D7.2 53.77,69.723 54.356,70.309 54.356,73.455 54.942,74.041 62.107,74.041 63.119,73.029 U7.4
+12: "JACK DC1.1" C1.1 H4.1 U4.1 | length 43.5
  Top Layer w0.8: H4.1 5.969,55.245 6.477,54.737 6.477,48.768 7.493,47.752 20.722,47.752 ; 16.002,44.726 16.742,45.466 C1.1 ; C1.1@20.722,45.572 20.722,47.752 ; U4.1 31.478,45.437 31.328,45.587 31.328,46.573 30.149,47.752 20.722,47.752
ACTIVE: R4.2 U3.12 | length 2.6
  Top Layer w0.2: R4.2@17.085,22.953 17.188,22.85 17.188,20.436 U3.12
CTS: R12.1 U3.23 | length 3.8
  Top Layer w0.2: R12.1 15.113,13.97 15.494,14.351 16.383,14.351 16.696,14.664 U3.23
DTR: Q2.2 R7.2 U3.28 | length 32.6
  Top Layer w0.2: U3.28 20.507,15.688 21.59,14.605 R7.2
  Top Layer w0.4: Q2.2 10.657,29.337 11.811,29.337 v1(12.954,30.48) ; R7.2 22.987,16.075 23.241,16.329 v1(23.241,16.383)
  Bottom Layer w0.4: v1(12.954,30.48) 21.971,30.48 23.241,29.21 v1(23.241,16.383)
EN: C8.1 Q1.3 R2.1 R6.1 U1.3 | length 49.5
  Top Layer w0.4: Q1.3 9.649,8.399 9.649,6.734 R6.1 10.541,6.731 10.667,6.605 10.795,6.477 10.795,3.536 11.029,3.302 30.373,3.302 30.607,3.536 C8.1 R2.1 33.528,17.018 33.782,17.272 33.782,22.481 34.016,22.715 34.993,22.715 U1.3@35.238,22.96
GND: "JACK DC1.2" "JACK DC1.3" AMS1.1 C1.2 C2.2 C3.2 C4.2 C5.2 C6.2 C7.2 C8.2 C9.2 C10.2 C11.2 C12.2 C13.1 C14.1 C15.2 C16.2 C17.2 C18.2 D1.1 D3.1 D4.1 H1.4 H2.2 H3.2 H4.2 J1.6 J1.9 J1.14 J1.20 J1.25 J1.30 J1.34 J1.39 J2.2 J3.2 J3.5 J4.2 J5.2 J5.5 LD1.2 LD2.2 LD3.2 LD4.2 LD5.2 Q3.1 Q4.1 Q5.1 R19.2 R22.2 R25.2 SW1.1 SW2.1 SW3.1 SW3.4 SW4.1 SW4.4 SW5.1 SW5.4 SW6.1 SW6.4 U1.1 U1.38 U1.39 U1.40 U1.41 U1.42 U1.43 U1.44 U1.45 U1.46 U1.47 U2.2 U3.3 U3.29 U4.3 U4.5 U4.6 USB1.5 | length 701.9
  Top Layer w0.2: U3.29 18.196,17.558 U3.3
  Top Layer w0.25: C10.2@23.848,17.272 C10.2
  Top Layer w0.4: SW1.1 4.191,24.824 USB1.5@4.242,24.773 ; H4.2 2.413,52.705 ; H3.2 2.413,58.293 ; H2.2 2.794,63.754 2.413,63.373 2.413,58.293 ; C14.1 9.628,4.044 9.394,3.81 2.032,3.81 1.651,4.191 1.651,11.684 1.976,12.009 SW2.1 4.318,15.697 USB1.5@4.242,15.773 ; USB1.5@9.982,24.769 9.978,24.773 USB1.5@4.242,24.773 ; C13.1 10.287,35.711 10.287,37.592 10.541,37.846 12.954,37.846 13.335,38.227 13.335,39.751 13.462,39.878 ; Q3.1 26.838,67.437 LD3.2 ; D3.1 D4.1 14.712,28.879 14.478,28.645 14.478,26.523 14.705,26.296 ; C12.2 18.679,23.132 18.679,25.136 C11.2 18.669,25.908 18.281,26.296 14.705,26.296 ; C10.2 24.122,16.645 24.384,16.383 25.908,16.383 ; C5.2 25.801,24.003 25.547,24.257 25.273,24.257 25.005,24.525 AMS1.1 25.005,33.288 25.448,33.731 v1(28.194,33.731) ; J1.6 26.812,56.94 26.812,56.009 27.046,55.775 32.116,55.775 ; R19.2 LD3.2 ; C9.2@27.325,19.042 27.325,21.184 27.731,21.59 C6.2 29.093,21.6 30.97,21.6 C7.2 ; C9.2 27.412,16.871 26.924,16.383 25.908,16.383 ; C8.2 26.142,15.113 25.908,15.347 25.908,16.383 ; v1(29.21,67.437) 27.264,67.437 LD3.2 ; J1.9 31.882,54.59 31.882,55.541 32.116,55.775 ; Q4.1 LD4.2@47.879,67.437 ; U4.6 42.164,49.657 48.534,49.657 48.828,49.951 48.828,51.398 49.249,51.819 59.663,51.819 59.956,51.526 59.956,49.637 60.19,49.403 64.135,49.403 64.389,49.149 D1.1 66.834,47.085 67.183,46.736 67.183,44.958 67.691,44.45 ; U1.47 41.794,19.674 41.783,19.685 U1.40 41.772,18.16 41.783,18.149 41.772,18.137 41.772,16.646 41.783,16.635 U1.43@43.308,16.635 ; U1.39@43.308,18.16 U1.43@43.308,16.635 ; U1.47@43.308,19.674 U1.46 44.822,21.199 44.831,21.208 44.831,25.266 44.597,25.5 35.238,25.5 35.211,25.527 32.893,25.527 32.464,25.956 v1(32.464,33.655) ; J1.20 44.343,57.189 44.343,58.399 44.577,58.633 ; U1.45@44.833,18.16 44.833,16.635 U1.43@43.308,16.635 ; R22.2 47.879,67.609 LD4.2 48.178,67.31 v1(50.546,67.31) ; J1.25 52.012,54.6 51.081,54.6 50.847,54.834 50.847,58.399 51.081,58.633 ; U1.38 53.031,25.489 53.481,25.938 53.481,33.655 ; SW3.1 SW3.4 64.381,18.034 ; SW5.1 SW5.4 64.389,30.734 ; J1.30 57.038,57.194 57.038,58.399 56.804,58.633 51.081,58.633 ; Q5.1 69.043,66.929 69.4,67.286 69.4,67.336 69.8,67.736 LD5.2 ; C17.2 64.381,22.598 ; C15.2 64.147,9.644 64.381,9.878 ; v1(65.151,7.493) 64.623,7.493 64.389,7.259 H1.4 64.389,3.79 64.623,3.556 67.818,3.556 J3.5 67.945,4.953 68.199,5.207 73.283,5.207 73.644,4.846 75.136,4.846 75.37,4.612 75.37,3.878 J3.2 ; v1(65.151,9.779) 65.113,9.817 64.442,9.817 64.381,9.878 ; SW6.1 SW6.4 74.422,30.734 ; SW4.1 SW4.4 74.422,18.034 ; C3.2 C4.2 64.867,37.661 64.867,38.197 65.532,38.862 65.532,39.792 LD2.2 67.056,39.878 67.564,40.386 67.564,44.323 67.691,44.45 ; J1.39 71.865,54.5 72.771,53.594 C2.2 ; C18.2 74.422,22.606 ; C16.2 72.633,9.652 74.041,9.652 74.422,10.033 74.422,18.034 ; J4.2 88.773,4.826 88.773,6.731 89.027,6.985 109.982,6.985 110.49,6.477 J5.5 ; v1(88.646,8.89) 88.646,15.367 88.265,15.748 88.265,18.796 88.646,19.177 92.461,19.177 92.695,18.943 U2.2 ; J5.2 118.11,3.028 118.344,2.794 126.766,2.794 127,3.028 J2.2 ; 2.413,52.705 2.413,58.293 ; 2.413,52.705 2.413,45.466 3.153,44.726 9.652,44.726 9.652,40.132 9.906,39.878 13.462,39.878 ; USB1.5@4.242,15.773 9.978,15.773 10.338,16.133 10.338,18.694 13.863,18.694 14.097,18.929 14.097,23.133 14.773,23.809 LD1.2 14.773,26.228 14.705,26.296 ; USB1.5@4.242,15.773 USB1.5@4.242,24.773 ; 13.462,39.878 23.515,39.878 23.749,40.112 23.749,45.486 23.983,45.72 26.162,45.72 C1.2 26.416,42.926 27.432,41.91 32.337,41.91 U4.3 32.814,41.687 34.355,41.687 34.589,41.453 34.589,39.204 34.355,38.97 32.797,38.97 U4.5 v1(32.464,33.655) ; 32.116,55.775 36.538,55.775 36.772,56.009 36.772,56.94 J1.14 36.872,58.399 37.106,58.633 44.577,58.633 ; v1(32.464,33.655) 53.481,33.655 ; 44.577,58.633 51.081,58.633 ; 53.481,33.655 54.229,33.655 54.61,33.274 64.389,33.274 ; 64.381,9.878 64.381,18.034 ; 64.381,18.034 64.4,18.053 64.4,22.579 64.381,22.598 ; 64.381,22.598 64.389,22.606 64.389,30.734 ; 64.389,30.734 64.389,33.274 ; 64.389,33.274 74.422,33.274 ; 67.691,44.45 71.937,44.45 72.171,44.216 72.171,42.816 C2.2 ; C2.2 74.116,42.216 74.422,41.91 74.422,33.274 ; 74.422,18.034 74.422,22.606 ; 74.422,22.606 74.422,30.734 ; 74.422,30.734 74.422,33.274
  Bottom Layer w0.4: v1(28.194,33.731) 28.232,33.693 32.426,33.693 v1(32.464,33.655) ; v1(29.21,67.437) Q4.1 36.851,67.416 36.851,57.061 J1.14 ; v1(50.546,67.31) 50.927,66.929 Q5.1 ; J1.30 57.192,58.313 57.426,58.547 62.703,58.547 ; J1.34 62.469,57.237 62.469,58.313 62.703,58.547 ; v1(65.151,7.493) v1(65.151,9.779) ; J1.39 70.108,54.716 71.246,54.716 71.247,54.717 71.247,58.293 70.993,58.547 62.703,58.547 ; J3.2 76.835,4.953 76.835,6.223 77.597,6.985 88.412,6.985 88.646,6.751 ; J4.2 88.646,6.751 ; v1(88.646,8.89) 88.646,6.751 ; J5.5 110.49,6.382 110.724,6.616 117.876,6.616 118.11,6.382 J5.2
  other v1: 25.273,20.32 24.511,23.114
IO0: Q2.3 R3.1 R5.1 U1.25 | length 97.1
  Top Layer w0.4: v1(7.112,32.004) 9.51,32.004 Q2.3 9.779,31.979 9.779,32.512 10.287,33.02 10.287,33.77 R5.1 ; U1.25@52.738,8.99 53.995,8.99 54.229,8.756 54.229,7.62 53.038,6.429 53.038,5.624 R3.1@53.063,5.624 ; R3.1 v1(54.356,5.588)
  Bottom Layer w0.4: v1(7.112,32.004) 7.112,28.321 6.604,27.813 2.794,27.813 2.159,27.178 2.159,4.953 2.464,4.648 14.433,4.648 14.732,4.349 14.732,3.937 14.986,3.683 18.542,3.683 18.796,3.937 18.796,4.719 19.03,4.953 54.05,4.953 54.318,5.221 54.318,5.55 v1(54.356,5.588)
IO2: U1.24 U2.5 | length 73
  Top Layer w0.4: v1(49.657,1.016) 53.544,1.016 53.669,0.891 75.322,0.891 75.447,1.016 v1(94.488,1.016) ; v1(49.657,4.153) 49.674,4.17 49.674,7.711 U1.24 ; v1(99.568,11.684) 100.33,12.446 U2.5
  Bottom Layer w0.4: v1(49.657,1.016) v1(49.657,4.153) ; v1(94.488,1.016) 94.488,7.64 94.722,7.874 99.187,7.874 99.568,8.255 v1(99.568,11.684)
IO4: U1.26 U2.4 | length 53.2
  Top Layer w0.4: U1.26 54.846,10.249 54.991,10.103 54.991,8.997 55.363,8.625 74.252,8.625 75.025,9.398 v1(75.057,9.398) ; v1(96.647,11.176) 97.282,11.176 97.775,11.669 U2.4
  Bottom Layer w0.4: v1(75.057,9.398) 76.835,11.176 v1(96.647,11.176)
IO5: U1.29 U2.3 | length 54.8
  Top Layer w0.4: U1.29 54.826,14.059 55.207,14.44 v1(58.293,14.44) ; v1(85.471,22.098) 94.979,22.098 95.235,21.842 U2.3
  Bottom Layer w0.4: v1(58.293,14.44) 85.199,14.44 85.471,14.712 v1(85.471,22.098)
IO13: R11.2 U1.16 | length 37.1
  Top Layer w0.4: R11.2 v1(11.684,13.208) ; v1(39.497,6.453) 39.514,6.47 39.514,7.711 U1.16@39.543,7.74
  Bottom Layer w0.4: v1(11.684,13.208) 11.684,9.251 11.918,9.017 18.288,9.017 18.637,8.668 18.637,6.587 18.871,6.353 39.343,6.353 39.443,6.453 v1(39.497,6.453)
IO15: R12.2 U1.23 | length 46.1
  Top Layer w0.4: v1(12.954,5.461) 12.954,10.16 13.208,10.414 14.859,10.414 15.113,10.668 R12.2 ; U1.23@48.433,7.74 48.476,7.697 48.476,5.791 v1(48.514,5.753)
  Bottom Layer w0.4: v1(12.954,5.461) 15.113,5.461 15.679,4.895 17.982,4.895 18.74,5.653 48.36,5.653 48.46,5.753 v1(48.514,5.753)
IO18: U1.30 U2.7 | length 66
  Top Layer w0.4: U1.30 56.626,15.329 56.715,15.24 v1(56.769,15.24) ; v1(84.201,23.114) 104.775,23.114 105.405,22.484 U2.7
  Bottom Layer w0.4: v1(56.769,15.24) 84.032,15.24 84.266,15.474 84.266,22.908 84.239,22.934 84.239,23.076 v1(84.201,23.114)
IO19: U1.31 U2.9 | length 72
  Top Layer w0.4: U1.31@52.796,16.529 52.808,16.541 56.732,16.541 v1(56.77,16.503) ; v1(83.439,24.003) 110.109,24.003 110.49,23.622 110.49,17.277 U2.9
  Top Layer w0.5: U1.31 U1.31@52.796,16.529
  Bottom Layer w0.4: v1(56.77,16.503) 56.824,16.503 57.071,16.256 83.167,16.256 83.401,16.49 83.401,23.965 v1(83.439,24.003)
IO23: U1.37 U2.6 | length 57.7
  Top Layer w0.4: U1.37 52.909,24.036 55.478,24.036 55.572,24.13 v1(55.626,24.13)
  Bottom Layer w0.4: v1(55.626,24.13) 73.047,24.13 73.72,24.803 102.324,24.803 102.855,24.272 U2.6
IO25: R23.2 U1.10 | length 78.8
  Top Layer w0.4: v1(33.147,14.605) 33.201,14.605 33.767,14.04 35.208,14.04 U1.10 ; v1(61.087,61.722) 61.125,61.76 63.018,61.76 R23.2
  Bottom Layer w0.4: v1(33.147,14.605) 33.147,33.207 33.849,33.909 55.693,33.909 55.927,34.143 55.927,61.488 56.161,61.722 v1(61.087,61.722)
IO26: R20.2 U1.11 | length 78.6
  Top Layer w0.4: v1(32.258,13.462) 32.26,13.462 32.896,12.827 35.188,12.827 U1.11 ; R20.2 v1(45.085,63.627)
  Bottom Layer w0.4: v1(32.258,13.462) 32.258,24.469 32.024,24.703 26.461,24.703 26.227,24.937 26.227,35.814 27.116,36.703 42.993,36.703 43.227,36.937 43.227,61.769 v1(45.085,63.627)
IO27: R17.2 U1.12 | length 64.9
  Top Layer w0.4: R17.2 21.032,63.284 22.822,63.284 v1(22.86,63.246) ; v1(33.041,12.008) 33.096,12.008 33.566,11.538 35.207,11.538 U1.12
  Bottom Layer w0.4: v1(22.86,63.246) 22.897,63.209 22.897,49.383 23.131,49.149 25.293,49.149 25.527,48.915 25.527,24.237 25.761,24.003 31.135,24.003 31.369,23.769 31.369,12.573 31.907,12.035 33.014,12.035 v1(33.041,12.008)
IO34: C16.1 R14.1 SW4.2 SW4.3 U1.6 | length 54.4
  Top Layer w0.4: U1.6 38.882,19.139 39.116,18.904 v1(39.116,11.43) ; v1(65.181,11.43) 65.151,11.46 65.151,12.7 65.277,12.826 66.166,12.826 SW4.2 ; R14.1 67.056,11.967 66.294,12.729 SW4.2 ; C16.1@71.12,9.652 71.344,9.876 71.344,10.393 71.578,10.627 72.39,10.627 72.644,10.881 SW4.3 SW4.2
  Bottom Layer w0.4: v1(39.116,11.43) v1(65.181,11.43)
IO35: C15.1 R13.1 SW3.2 SW3.3 U1.7 | length 41.2
  Top Layer w0.4: U1.7 36.342,17.869 36.576,17.634 36.576,13.081 36.83,12.827 v1(38.1,12.827) ; v1(54.991,12.827) 55.045,12.827 55.11,12.891 56.452,12.891 SW3.2 ; R13.1 56.368,9.652 56.134,9.886 56.134,12.166 56.515,12.547 SW3.2 ; C15.1 61.717,9.888 61.717,10.307 62.029,10.619 62.631,10.619 62.865,10.853 SW3.3 SW3.2
  Bottom Layer w0.4: v1(38.1,12.827) v1(54.991,12.827)
IO36: C17.1 R15.1 SW5.2 SW5.3 U1.4 | length 39
  Top Layer w0.4: U1.4 35.246,21.698 39.351,21.698 v1(39.37,21.717) ; v1(54.611,24.836) 54.611,24.839 55.138,25.366 55.987,25.366 56.275,25.654 SW5.2 ; R15.1 57.149,22.606 56.515,23.24 SW5.2 ; C17.1 60.811,22.825 60.811,23.339 61.045,23.573 62.611,23.573 62.865,23.827 SW5.3 SW5.2
  Bottom Layer w0.4: v1(39.37,21.717) 40.279,21.717 40.513,21.951 40.513,24.404 40.945,24.836 v1@54.611,24.836
IO39: C18.1 R16.1 SW6.2 SW6.3 U1.5 | length 59.1
  Top Layer w0.4: U1.5 39.227,20.409 39.316,20.32 v1(39.37,20.32) ; R16.1 66.421,22.606 66.167,22.86 SW6.2 SW6.3 ; C18.1 70.603,22.851 70.603,23.261 70.923,23.581 72.283,23.581 72.517,23.815 SW6.3 ; v1(73.622,23.495) 73.66,23.533 73.66,24.933 73.426,25.167 73.411,25.167 72.924,25.654 SW6.3
  Bottom Layer w0.4: v1(39.37,20.32) 40.767,20.32 41.402,20.955 41.402,23.196 41.966,23.76 54.865,23.76 55.295,23.33 73.403,23.33 73.568,23.495 v1(73.622,23.495)
NetC13_2: C13.2 R5.2 SW1.2 | length 6.5
  Top Layer w0.4: SW1.2 4.206,35.687 C13.2 8.769,35.681 8.769,33.788 R5.2 R5.2@8.775,33.788
NetC14_2: C14.2 R6.2 SW2.2 | length 5.9
  Top Layer w0.4: SW2.2 4.374,4.953 C14.2 8.14,4.965 8.14,6.719 R6.2 ; C14.2@8.14,4.953 C14.2@8.382,4.953
NetD1_2: D1.2 L1.1 U4.2 | length 56.2
  Top Layer w0.4: U4.2 35.003,43.737 35.306,43.434 35.306,36.672 35.54,36.437 47.518,36.437 47.752,36.672 47.752,48.26 48.006,48.514 54.261,48.514 L1.1 54.651,48.514 61.361,48.514 61.595,48.28 61.595,43.307 61.976,42.926 64.23,42.926 D1.2
NetD2_1: D2.1 USB1.1 | length 14.7
  Top Layer w0.4: USB1.1 10.268,21.863 10.268,22.46 10.668,22.86 v1(11.176,22.86) ; v1(11.684,32.004) 11.738,32.004 11.865,31.877 D2.1
  Bottom Layer w0.4: v1(11.176,22.86) 11.176,23.368 11.684,23.876 v1(11.684,32.004)
NetD5_1: D5.1 Q3.3 RL1.4 | length 18.2
  Top Layer w0.4: D5.1 8.89,72.517 Q3.3 15.347,72.751 15.347,73.406 16.637,73.406 16.891,73.66 16.891,74.676 17.272,75.057 20.447,75.057 20.701,75.311 20.955,75.565 RL1.4
NetD6_1: D6.1 Q4.3 RL2.4 | length 18.4
  Top Layer w0.4: D6.1 30.861,72.517 Q4.3 36.703,72.644 36.703,73.406 36.957,73.66 38.989,73.66 39.243,73.914 ; 39.243,74.168 39.243,76.454 39.624,76.835 42.819,76.835 43.053,77.069 RL2.4
NetD7_1: D7.1 Q5.3 RL3.4 | length 18.6
  Top Layer w0.4: D7.1 52.197,72.517 58.293,72.517 58.42,72.39 59.69,72.39 59.944,72.644 59.944,74.188 60.178,74.422 63.754,74.422 64.262,74.93 RL3.4
NetJP1_1: JP1.1 RL1.3 | length 9.3
  Bottom Layer w2: JP1.1 20.955,98.853 RL1.3
NetJP1_2: JP1.2 RL1.1 | length 23.6
  Bottom Layer w2: JP1.2 14.859,99.949 RL1.1
NetJP1_3: JP1.3 RL1.2 | length 9.1
  Bottom Layer w2: RL1.2 8.763,99.361 JP1.3
NetJP2_1: JP2.1 RL2.3 | length 9.3
  Bottom Layer w2: JP2.1 43.053,98.9 RL2.3
NetJP2_2: JP2.2 RL2.1 | length 23.6
  Bottom Layer w2: JP2.2 36.957,99.996 RL2.1
NetJP2_3: JP2.3 RL2.2 | length 9.1
  Bottom Layer w2: RL2.2 30.861,99.314 JP2.3
NetJP3_1: JP3.1 RL3.3 | length 9.5
  Bottom Layer w2: JP3.1 64.262,98.639 RL3.3
NetJP3_2: JP3.2 RL3.1 | length 23.8
  Bottom Layer w2: JP3.2 58.166,99.735 RL3.1
NetJP3_3: JP3.3 RL3.2 | length 9.2
  Bottom Layer w2: RL3.2 52.07,99.575 JP3.3
NetLD1_1: LD1.1 R4.1 | length 2.7
  Top Layer w0.4: R4.1 15.59,24.013 16.273,24.696 16.323,24.696 16.723,25.096 LD1.1
NetLD2_1: LD2.1 R1.1 | length 3
  Top Layer w0.4: R1.1 62.738,38.374 62.972,38.608 63.373,38.608 63.627,38.862 63.627,39.837 LD2.1
NetLD3_1: LD3.1 U5.2
NetLD4_1: LD4.1 U6.2 | length 4.1
  Top Layer w0.4: U6.2 47.752,65.786 LD4.1
NetLD5_1: LD5.1 U7.2 | length 4.3
  Top Layer w0.4: U7.2 69.469,65.405 LD5.1
NetQ1_1: Q1.1 R7.1 | length 14
  Top Layer w0.25: v1(21.717,12.391) 21.732,12.376 22.283,12.376 22.987,13.08 R7.1 R7.1@22.942,13.15
  Top Layer w0.4: Q1.1 10.668,10.973 10.668,12.046 10.941,12.319 v1(12.7,12.319)
  Bottom Layer w0.4: v1(12.7,12.319) 12.736,12.355 21.681,12.355 v1(21.717,12.391)
NetQ2_1: Q2.1 R8.1 | length 2
  Top Layer w0.4: Q2.1 8.744,29.331 8.744,27.463 R8.1
NetQ3_2: Q3.2 R18.1 R19.1 | length 16.4
  Top Layer w0.5: Q3.2 25.107,69.977 25.4,70.27 25.4,70.827 ; R19.1 26.924,71.247 25.908,71.247 25.781,71.12 25.693,71.12 25.4,70.827 ; R18.1 25.693,72.91 25.4,72.617 25.4,70.827
NetQ4_2: Q4.2 R21.1 R22.1 | length 13.5
  Top Layer w0.4: Q4.2 36.932,69.977 37.948,70.993 R22.1@47.879,70.993 ; R22.1 R21.1@47.879,73.037
NetQ5_2: Q5.2 R24.1 R25.1 | length 11.7
  Top Layer w0.4: Q5.2@58.293,69.977 58.414,69.856 69.729,69.856 R25.1
NetR17_1: R17.1 U5.1 | length 2.8
  Top Layer w0.4: R17.1 19.443,64.528 U5.1
NetR18_2: R18.2 U5.3 | length 4.9
  Top Layer w0.5: U5.3 23.241,73.152 24.345,73.152 24.638,73.445 24.638,74.129 24.931,74.422 27.039,74.422 R18.2
NetR20_1: R20.1 U6.1 | length 2.3
  Top Layer w0.4: R20.1 41.312,63.627 41.656,63.971 U6.1
NetR21_2: R21.2 U6.3 | length 4.5
  Top Layer w0.4: U6.3 45.339,73.406 45.593,73.66 45.593,74.303 45.827,74.537 R21.2@47.879,74.537
NetR23_1: R23.1 U7.1 | length 2
  Top Layer w0.4: R23.1 U7.1
NetR24_2: R24.2 U7.3 | length 5.3
  Top Layer w0.4: U7.3 68.219,73.025 68.453,73.259 68.453,74.168 68.695,74.41 R24.2
NetR28_2: R28.2 U3.26 | length 4.5
  Top Layer w0.2: U3.26 18.196,14.951 18.542,14.605 19.939,14.605 20.193,14.351 R28.2
PI_RXD: J1.10 R27.1 | length 76.5
  Top Layer w0.4: J1.10 31.792,58.867 32.258,59.333 78.633,59.333 78.867,59.099 78.867,32.894 78.633,32.66 78.241,32.66 R27.1
PI_TXD: J1.8 R26.1 | length 84.1
  Top Layer w0.4: J1.8 29.252,59.567 29.718,60.033 79.395,60.033 79.629,59.799 79.629,30.714 79.395,30.48 78.093,30.48 R26.1
RTS: Q1.2 R8.2 R11.1 U3.24 | length 36.7
  Top Layer w0.2: v1(16.891,13.208) 16.891,14.159 17.196,14.464 U3.24
  Top Layer w0.4: v1(6.35,13.208) R11.1 8.657,13.199 8.657,10.911 Q1.2 ; v1(6.35,26.416) 10.033,26.416 10.287,26.67 10.287,27.42 R8.2
  Bottom Layer w0.4: v1(6.35,26.416) 6.312,26.378 6.312,26.236 6.302,26.227 6.302,13.397 6.312,13.388 6.312,13.246 v1(6.35,13.208) 7.366,14.224 12.101,14.224 13.117,13.208 v1(16.891,13.208)
RX2: R26.2 U1.27 | length 53.1
  Top Layer w0.4: v1(46.99,26.436) 46.99,12.319 48.006,11.303 52.511,11.303 U1.27 ; v1(54.281,26.924) 54.281,28.214 54.515,28.448 v1(56.261,28.448) ; v1(75.222,30.226) 75.276,30.226 75.403,30.353 R26.2
  Bottom Layer w0.4: v1(46.99,26.436) 48.889,26.436 53.088,26.436 53.538,26.886 54.243,26.886 v1(54.281,26.924) ; v1(56.261,28.448) 74.988,28.448 75.222,28.682 v1(75.222,30.226)
RXD: H1.3 R9.1 U3.25 | length 59.9
  Top Layer w0.2: U3.25 17.696,14.308 18.034,13.97 R9.1
  Top Layer w0.3: R9.1 18.288,13.208 18.288,13.667 18.427,13.806 19.14,13.806 v1(19.177,13.843) ; v1(31.623,9.906) 31.623,3.224 32.206,2.641 61.388,2.641 61.849,3.102 H1.3
  Bottom Layer w0.3: v1(19.177,13.843) 28.526,13.843 28.702,13.667 28.702,10.16 28.956,9.906 v1(31.623,9.906)
RXD0: R10.2 U1.34 | length 45.4
  Top Layer w0.4: R10.2 23.102,9.791 23.749,9.144 v1(23.749,7.366) ; v2(50.8,20.32) 50.854,20.32 50.954,20.42 U1.34@52.738,20.42
  Bottom Layer w0.4: v1(23.749,7.366) 37.042,7.366 37.276,7.6 37.276,15.068 37.51,15.302 46.417,15.302 46.863,15.748 46.863,15.881 46.928,15.946 46.928,20.086 47.2,20.358 50.762,20.358 v2(50.8,20.32)
SCL: J3.3 J4.3 J5.3 R29.1 U1.36 | length 111
  Top Layer w0.4: U1.36 54.376,22.949 54.61,22.714 v1(54.61,20.32) ; v1(79.629,20.574) 79.629,18.927 79.395,18.693 R29.1 78.105,8.509 78.421,8.193 85.533,8.193 ; J4.3 86.106,7.62 85.533,8.193 ; J5.3 115.57,7.859 115.336,8.093 88.98,8.093 88.977,8.09 88.315,8.09 88.212,8.193 85.533,8.193
  Bottom Layer w0.4: v1(54.61,20.32) 67.915,20.32 67.953,20.282 68.826,20.282 68.864,20.32 70.866,20.32 73.025,22.479 79.356,22.479 79.591,22.245 79.591,20.612 v1(79.629,20.574) ; J3.3 73.025,1.524 73.341,1.208 81.808,1.208 82.042,1.442 82.042,5.842 82.423,6.223 85.872,6.223 86.106,5.989 J4.3
SDA: J3.4 J4.4 J5.4 R30.1 U1.33 | length 100.4
  Top Layer w0.4: U1.33 55.08,19.139 55.427,19.486 63.42,19.486 v1(63.425,19.482) ; v1(75.438,17.399) 75.476,17.437 75.476,17.678 76.207,18.409 R30.1@76.448,18.409 ; R30.1 76.454,7.874 76.835,7.493 83.185,7.493 83.566,7.112 J4.4 83.656,4.609 83.656,3.339 84.179,2.816 112.796,2.816 113.03,3.05 J5.4
  Bottom Layer w0.4: v1(63.425,19.482) 63.429,19.486 75.129,19.486 75.438,19.177 v1(75.438,17.399) ; J3.4 70.485,0.742 70.719,0.508 83.332,0.508 83.566,0.742 J4.4
SOIL: J2.3 J5.7 | length 22.8
  Bottom Layer w0.5: J5.7 105.41,6.985 105.791,7.366 123.952,7.366 124.46,6.858 J2.3
TX2: R27.2 U1.28 | length 51.5
  Top Layer w0.4: v1(49.276,25.636) 49.276,12.934 49.51,12.7 52.638,12.7 U1.28 ; v1(76.327,33.401) 76.365,33.363 76.365,32.486 R27.2
  Bottom Layer w0.4: v1(49.276,25.636) 54.592,25.636 55.081,26.125 55.081,30.114 55.063,30.132 55.063,32.132 55.315,32.385 75.057,32.385 75.311,32.639 75.311,33.147 75.565,33.401 v1(76.327,33.401)
TXD: H1.2 R10.1 R28.1 | length 47
  Top Layer w0.4: R28.1@20.217,11.291 R10.1 21.723,11.297 29.712,11.297 v1(29.718,11.303) ; v1(31.618,11.289) 32.653,11.289 33.02,10.922 33.02,4.171 33.9,3.291 57.774,3.291 H1.2
  Bottom Layer w0.4: v1(29.718,11.303) 29.725,11.296 31.611,11.296 v1(31.618,11.289)
TXD0: R9.2 U1.35 | length 50.4
  Top Layer w0.4: R9.2 18.034,8.489 18.268,8.255 v1(21.717,8.255) ; v2(50.8,21.717) 50.814,21.703 52.724,21.703 U1.35@52.738,21.69
  Bottom Layer w0.4: v1(21.717,8.255) 36.195,8.255 36.576,8.636 36.576,15.494 37.084,16.002 45.994,16.002 46.228,16.236 46.228,21.463 46.482,21.717 v2(50.8,21.717)
USB_DN: D3.2 U3.5 USB1.2 | length 37.5
  Top Layer w0.2: U3.5 22.082,18.558 22.352,18.288 v1(22.352,17.653)
  Top Layer w0.4: USB1.2 10.332,21.089 11.691,21.089 v1(12.446,21.844) ; D3.2 19.304,27.559 19.685,27.94 v1(19.685,29.464)
  Bottom Layer w0.4: v1(12.446,21.844) 12.446,29.21 12.685,29.449 19.67,29.449 v1(19.685,29.464) 21.463,29.464 22.352,28.575 v1(22.352,17.653)
USB_DP: D4.2 U3.4 USB1.3 | length 37.6
  Top Layer w0.2: U3.4 20.09,18.034 21.336,18.034 21.59,17.78 v1(21.59,16.51)
  Top Layer w0.4: USB1.3 10.338,20.295 12.421,20.295 v1(12.446,20.32) ; D4.2 16.167,27.559 16.63,27.096 v1(16.637,27.096)
  Bottom Layer w0.4: v1(12.446,20.32) 12.5,20.32 13.281,21.101 13.281,26.87 13.507,27.096 v1(16.637,27.096) 17.745,27.096 17.745,24.336 18.653,24.336 18.653,27.096 19.258,27.096 20.91,27.096 21.59,26.416 v1(21.59,16.51)
pads on no net: J1.1 J1.2 J1.3 J1.4 J1.5 J1.7 J1.11 J1.12 J1.13 J1.15 J1.16 J1.17 J1.18 J1.19 J1.21 J1.22 J1.23 J1.24 J1.26 J1.27 J1.28 J1.29 J1.31 J1.32 J1.33 J1.35 J1.36 J1.37 J1.38 J1.40 J5.6 J5.8 J5.9 J5.10 U1.8 U1.9 U1.13 U1.14 U1.15 U1.17 U1.18 U1.19 U1.20 U1.21 U1.22 U1.32 U2.10 U2.11 U2.12 U2.13 U2.14 U2.28 U2.29 U3.1 U3.2 U3.9 U3.10 U3.11 U3.13 U3.14 U3.15 U3.16 U3.17 U3.18 U3.19 U3.20 U3.21 U3.22 U3.27 USB1.4
copper on no net:
  other v3: 7.402,18.069 7.402,22.469

## Polygon pours and split planes (outlines as drawn)
GND on Bottom Layer "GND_TOP" (solid, remove dead copper, pour order 1): 0,105.283 0,0 136.144,0 136.144,105.283
GND on Top Layer "GND_TOP" (solid, remove dead copper, pour order 0): 0,105.283 0,0 136.144,0 136.144,105.283

## Silkscreen, mask and mechanical layers (free items; w line width, h text height)
Top Overlay:
  text "+" at 7.62,65.78 h0.8
  text "5V" at 9.017,64.516 h0.8
  text "-" at 7.67,63.252 h0.8
  text "+" at 7.747,60.319 h0.8
  text "5V" at 9.144,59.055 h0.8
  text "-" at 7.797,57.791 h0.8
  text "+" at 7.747,54.731 h0.8
  text "5V/12V" at 9.271,53.34 h0.8
  text "-" at 7.747,52.051 h0.8
  text "Depend on the power supply" at 9.271,51.762 h0.6
Mechanical 1:
  the board outline again, w0.2

## Text inside footprints (layer, text, board x,y; h text height)
JP1: Top Overlay "CON" at 16.571,98.459 h1.52 r180
JP2: Top Overlay "CON" at 38.716,98.459 h1.52 r180
JP3: Top Overlay "CON" at 59.664,98.459 h1.52 r180
U1: Top Overlay "*" at 33.525,24.854 h1.27; Mechanical 13 "*" at 36.293,24.854 h1.27